# Altium PCB PCB V1.0.PcbDoc (part 3 of 3)
Units mil, origin at the board's own origin, x right, y up, seen from the top; angles counter-clockwise.
Board outline 1771.65 x 1771.65 mil, 6 copper layers (SIG/GND1, GND1, PWR, SIG/GND2, GND2, SIG/GND3), stack 60.866 mil thick; 267 components, 128 nets, 828 pads, 918 vias.
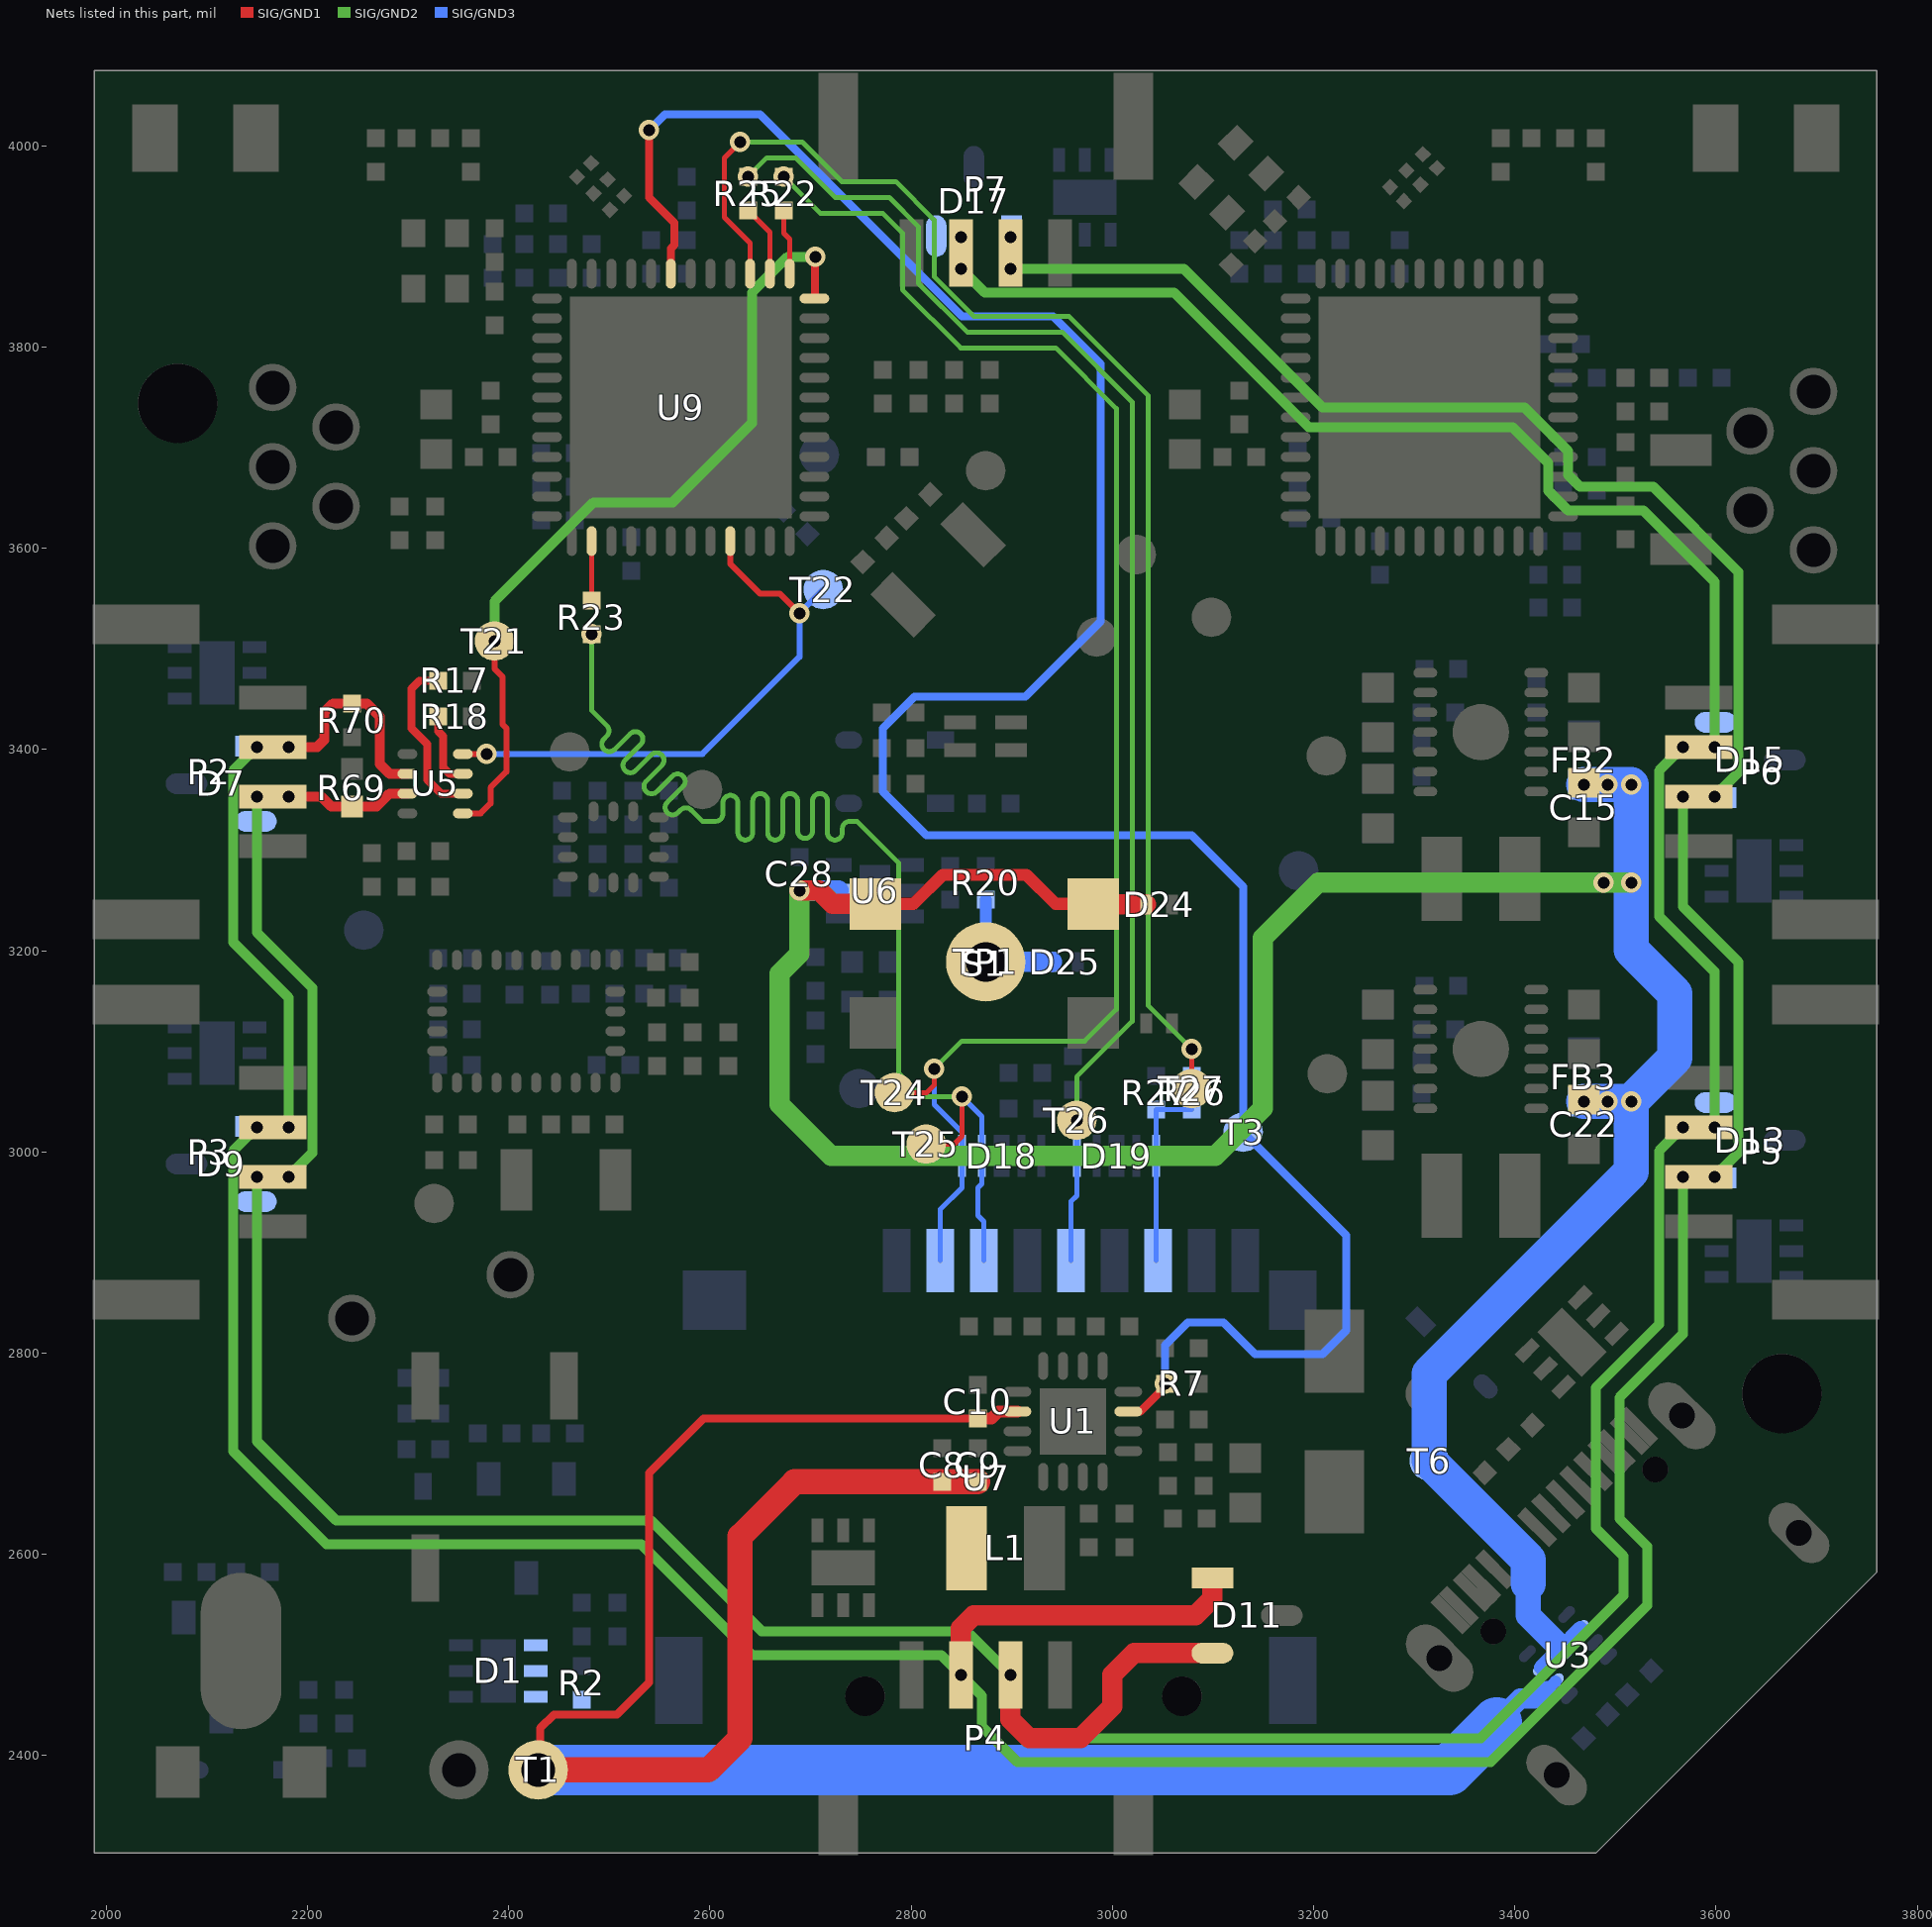
[diagram p7: the nets of this part, all layers, seen from the top]

## Via types
v1: diameter 20, hole 12, SIG/GND1 to SIG/GND3, tented both sides, 851 vias
v2: diameter 19.68, hole 11.81, SIG/GND1 to SIG/GND3, tented both sides, 67 vias

## Nets (pads, with @x,y where several pads share a name; then routed paths per layer and width w, separated by ;. In a path a pad name is that pad's centre, name@x,y a point inside that pad or via, vN(x,y) a via of type N, cw(c..) or ccw(c..) an arc to the next point about the centre after c; other vN are vias at no path point) (continued)
RS485_A: D7.1 D9.1 D11.1 D13.1 D15.1 D17.1 P2.2 P3.2 P4.2 P5.2 P6.2 P7.2 R70.1 U5.6 | length 5038.6
  SIG/GND1 w10: P2.2@2165.35,3402.56 v1(2181.1,3402.56) 2209.65,3402.56 2216.54,3409.45 2216.54,3437.01 2225.39,3445.87 R70.1@2244.09,3445.87 2258.86,3445.87 2271.65,3433.07 2271.65,3385.83 2281.5,3375.98 U5.6@2299.21,3375.98
  SIG/GND1 w20: v1(2849.41,2480.31) 2849.41,2526.57 2862.2,2539.37 3082.68,2539.37 3099.39,2556.08 D11.1@3099.39,2576.77
  SIG/GND2 w10: v1(2181.1,3402.56) v1(2149.61,3402.56) 2125.98,3378.94 2125.98,3208.66 2181.1,3153.54 v1(2181.1,3024.61) v1(2149.61,3024.61) 2125.98,3000.98 2125.98,2702.81 2218.56,2610.24 2531.5,2610.24 2641.73,2500 2829.72,2500 v1(2849.41,2480.31) 2870.08,2459.65 2870.08,2429.13 2905.51,2393.7 3375.93,2393.7 3531.5,2549.27 3531.5,2608.21 3503.94,2635.77 3503.94,2755.91 3566.93,2818.9 v1(3566.93,2975.39) v1(3598.43,2975.39) 3622.05,2999.02 3622.05,3188.98 3566.93,3244.09 v1(3566.93,3353.35) v1(3598.43,3353.35) 3622.05,3376.97 3622.05,3576.71 3537.34,3661.42 3464.57,3661.42 3452.76,3673.23 3452.76,3696.85 3409.45,3740.16 3208.66,3740.16 3070.87,3877.95 v1(2898.62,3877.95) v1(2898.62,3909.45)
RS485_B: D7.2 D9.2 D11.2 D13.2 D15.2 D17.2 P2.3 P3.3 P4.3 P5.3 P6.3 P7.3 R69.2 U5.7 | length 4811.6
  SIG/GND1 w10: v1(2181.1,3353.35) 2213.58,3353.35 2223.43,3343.5 R69.2@2244.09,3343.5 2268.7,3343.5 2281.5,3356.3 U5.7@2299.21,3356.3
  SIG/GND1 w20: v1(2898.62,2480.31) 2898.62,2436.02 2917.32,2417.32 2968.5,2417.32 3000,2448.82 3000,2480.32 3021.65,2501.97 D11.2@3099.39,2501.97
  SIG/GND2 w10: v1(2181.1,3353.35) v1(2149.61,3353.35) 2149.61,3218.45 2204.72,3163.33 2204.72,2999.02 v1(2181.1,2975.39) v1(2149.61,2975.39) 2149.61,2712.6 2228.35,2633.86 2541.28,2633.86 2651.52,2523.62 2855.32,2523.62 v1(2898.62,2480.31) 2898.62,2436.02 2917.32,2417.32 3366.14,2417.32 3507.87,2559.06 3507.87,2598.43 3480.32,2625.98 3480.32,2765.69 3543.31,2828.68 3543.31,3000.98 v1(3566.93,3024.61) v1(3598.43,3024.61) 3598.43,3179.19 3543.31,3234.31 3543.31,3378.94 v1(3566.93,3402.56) v1(3598.43,3402.56) 3598.43,3566.93 3527.56,3637.8 3452.76,3637.8 3433.07,3657.48 3433.07,3685.04 3397.64,3720.47 3194.94,3720.47 3061.08,3854.33 2873.03,3854.33 v1(2849.41,3877.95) v1(2849.41,3909.45)
RS485_R\E\: R17.1 U5.2 | length 168.1
  SIG/GND1 w8: R17.1@2329.72,3468.5 2311.02,3468.5 2303.15,3460.63 2303.15,3421.26 2318.9,3405.51 2318.9,3370.08 2332.68,3356.3 U5.2@2354.33,3356.3
RS485_RX: T21.0 U5.1 U9.12 | length 822.5
  SIG/GND1 w6: U5.1@2354.33,3336.61 2372.05,3336.61 2381.89,3346.46 2381.89,3362.2 2397.64,3377.95 2397.64,3421.26 2393.7,3425.2 2393.7,3472.44 2385.83,3480.32 v1(2385.83,3507.87)
  SIG/GND1 w8: U9.12@2703.74,3848.43 2704.23,3848.92 2704.23,3889.27 v1(2704.72,3889.76)
  SIG/GND2 w10: v1(2385.83,3507.87) 2385.83,3547.24 2484.25,3645.67 2562.99,3645.67 2641.73,3724.41 2641.73,3854.33 2677.17,3889.76 v1(2704.72,3889.76)
RS485_S\H\D\N\: R18.1 U5.3 | length 75.1
  SIG/GND1 w8: R18.1@2329.72,3433.07 2329.72,3418.31 2334.65,3413.39 2334.65,3382.36 2341.02,3375.98 U5.3@2354.33,3375.98
RS485_TX: T22.0 U5.4 U9.45 | length 563.2
  SIG/GND1 w6: U5.4@2354.33,3395.67 v1(2377.95,3395.67) ; U9.45@2620.08,3607.28 2620.08,3584.65 2649.61,3555.12 2669.29,3555.12 v1(2688.98,3535.43)
  SIG/GND3 w6: v1(2377.95,3395.67) 2592.52,3395.67 2688.98,3492.13 v1(2688.98,3535.43) T22.0@2712.6,3559.06
SD_MISO: R26.1 T27.0 U9.15 | length 1424.4
  SIG/GND1 w5.12: v1(2629.92,4003.94) 2614.17,3988.19 2614.17,3929.13 2639.76,3903.54 U9.15@2639.76,3873.03 ; T27.0@3078.74,3062.99 v1(3078.74,3102.36)
  SIG/GND2 w4.83: v1(2629.92,4003.94) 2691.56,4003.94 2730.93,3964.57 2784.7,3964.57 2822.83,3926.43 2822.83,3870.08 2862.2,3830.71 2956.69,3830.71 3035.43,3751.97 3035.43,3145.67 v1(3078.74,3102.36)
  SIG/GND3 w5.12: R26.1@3078.74,3075.79 3078.74,3098.43 v1(3078.74,3102.36)
SD_MISO_1: D19.1 D19.10 R26.2 R27.2 U7.7 | length 185.4
  SIG/GND3 w5.12: U7.7@3043.31,2892.32 D19.1@3043.31,2983.07 D19.10@3043.31,3009.06 R27.2@3043.31,3042.32 R26.2@3078.74,3042.32
SD_MOSI: R23.1 U9.38 | length 59.1
  SIG/GND1 w5.12: R23.1@2482.28,3548.23 U9.38@2482.28,3607.28
SD_MOSI_1: D18.4 D18.7 R23.2 T25.0 U7.3 | length 1490.4
  SIG/GND1 w5.12: T25.0@2814.96,3007.87 2842.52,3007.87 2850.39,3015.75 v1(2850.39,3055.12)
  SIG/GND2 w4.83: v1(2482.28,3514.76) 2482.28,3438.98 2487.2,3434.06 2488.91,3432.35 2497.39,3423.87 cw(c2492.15,3418.63) 2497.39,3413.38 2494.64,3410.64 ccw(c2499.89,3405.4) 2494.64,3400.15 ccw(c2499.89,3405.4) 2505.13,3400.15 2520.61,3415.63 cw(c2525.85,3410.39) 2531.1,3415.63 cw(c2525.85,3410.39) 2531.1,3405.14 2515.62,3389.66 ccw(c2520.86,3384.42) 2515.62,3379.18 ccw(c2520.86,3384.42) 2526.11,3379.18 2541.58,3394.65 cw(c2546.83,3389.41) 2552.07,3394.65 cw(c2546.83,3389.41) 2552.07,3384.17 2536.59,3368.69 ccw(c2541.84,3363.45) 2536.59,3358.2 ccw(c2541.84,3363.45) 2547.08,3358.2 2562.56,3373.68 cw(c2567.8,3368.44) 2573.04,3373.68 cw(c2567.8,3368.44) 2573.04,3363.19 2557.57,3347.72 ccw(c2562.81,3342.47) 2557.57,3337.23 ccw(c2562.81,3342.47) 2568.06,3337.23 2570.8,3339.97 cw(c2576.04,3334.73) 2581.29,3339.97 2583,3338.26 2592.52,3328.74 2595.47,3328.74 2605.46,3328.74 ccw(c2605.46,3336.16) 2612.87,3336.16 2612.87,3347.13 cw(c2620.29,3347.13) 2627.7,3347.13 2627.7,3317.51 ccw(c2635.12,3317.51) 2642.53,3317.51 2642.53,3348.84 cw(c2649.95,3348.84) 2657.37,3348.84 2657.37,3317.51 ccw(c2664.78,3317.51) 2672.2,3317.51 2672.2,3348.84 cw(c2679.61,3348.84) 2687.03,3348.84 2687.03,3319.14 ccw(c2694.44,3319.14) 2701.86,3319.14 2701.86,3348.84 cw(c2709.27,3348.84) 2716.69,3348.84 2716.69,3317.51 ccw(c2724.11,3317.51) 2731.52,3317.51 2731.52,3321.32 cw(c2738.94,3321.32) 2738.94,3328.74 2741.35,3328.74 2746.06,3328.74 2787.4,3287.4 2787.4,3078.74 2811.02,3055.12 v1(2850.39,3055.12)
  SIG/GND3 w5.12: v1(2850.39,3055.12) 2870.08,3035.43 D18.7@2870.08,3009.06 D18.4@2870.08,2983.07 2870.08,2968.5 2866.14,2964.57 2866.14,2937.01 2872.24,2930.91 U7.3@2872.24,2892.32
SD_NSS: R22.1 U9.13 | length 65.4
  SIG/GND1 w5.12: R22.1@2673.23,3936.02 2673.23,3913.39 2679.13,3907.48 U9.13@2679.13,3873.03
SD_NSS_1: D18.5 D18.6 R22.2 T24.0 U7.2 | length 1531.2
  SIG/GND1 w5.12: T24.0@2783.46,3059.06 2815.25,3059.06 2822.83,3066.64 v1(2822.83,3082.68)
  SIG/GND2 w4.83: v1(2673.23,3969.49) 2709.65,3933.07 2771.65,3933.07 2791.34,3913.39 2791.34,3857.03 2849.16,3799.21 2943.65,3799.21 3003.94,3738.92 3003.94,3141.73 2972.44,3110.24 2850.39,3110.24 v1(2822.83,3082.68)
  SIG/GND3 w5.12: v1(2822.83,3082.68) 2822.83,3047.24 2850.39,3019.69 D18.6@2850.39,3009.06 D18.5@2850.39,2983.07 2850.39,2964.57 2828.94,2943.11 U7.2@2828.94,2892.32
SD_SCK: R25.1 U9.14 | length 72
  SIG/GND1 w5.12: R25.1@2637.8,3936.02 2659.45,3914.37 U9.14@2659.45,3873.03
SD_SCK_1: D19.5 D19.6 R25.2 T26.0 U7.5 | length 1401.5
  SIG/GND2 w4.83: v1(2637.8,3969.49) 2656.5,3988.19 2685.04,3988.19 2724.41,3948.82 2778.18,3948.82 2807.09,3919.91 2807.09,3863.56 2855.68,3814.96 2950.17,3814.96 3019.68,3745.45 3019.68,3129.92 2964.57,3074.8 v1(2964.57,3031.5)
  SIG/GND3 w5.12: U7.5@2958.86,2892.32 2958.86,2950.99 2964.57,2956.69 D19.5@2964.57,2983.07 D19.6@2964.57,3009.06 v1(2964.57,3031.5)
STAT: R7.1 T3.0 U1.3 U9.19 | length 2473.1
  SIG/GND1 w8: v1(2539.37,4015.75) 2539.37,3948.82 2564.45,3923.74 2564.45,3901.32 2561.02,3897.9 U9.19@2561.02,3873.03 ; U1.3@3015.75,2742.13 3027.56,2742.13 3052.17,2766.73 v1(3052.17,2769.69)
  SIG/GND3 w8: v1(2539.37,4015.75) 2555.12,4031.5 2649.61,4031.5 2850.39,3830.71 2940.94,3830.71 2988.19,3783.46 2988.19,3527.56 2913.39,3452.76 2803.15,3452.76 2771.65,3421.26 2771.65,3358.27 2814.96,3314.96 3078.74,3314.96 3129.92,3263.78 T3.0@3129.92,3019.68 3232.28,2917.32 3232.28,2822.83 3208.66,2799.21 3141.73,2799.21 3110.24,2830.71 3074.8,2830.71 3052.17,2808.07 v1(3052.17,2769.69)
Touch_input: D25.1 R20.2 TP1.0 | length 128
  SIG/GND3 w12: TP1.0@2874.02,3188.98 R20.2@2874.02,3250.98
  SIG/GND3 w20: TP1.0@2874.02,3188.98 D25.1@2939.96,3188.98
VBAT: C8.1 C9.1 C10.2 D1.4 D1.5 D1.6 L1.2 R2.2 T1.0 U1.10 U3.6 | length 2489.8
  SIG/GND1 w8: T1.0@2429.13,2385.83 2431.29,2387.98 2431.29,2427.35 2444.88,2440.94 2507.62,2440.94 2539.37,2472.69 2539.37,2681.1 2593.5,2735.24 C10.2@2866.14,2735.24
  SIG/GND1 w12: C10.2@2866.14,2735.24 2879.72,2735.24 2886.61,2742.13 U1.10@2905.51,2742.13
  SIG/GND1 w25: T1.0@2429.13,2385.83 2598.43,2385.83 2629.92,2417.32 2629.92,2618.11 2684.06,2672.24 C8.1@2830.71,2672.24 C9.1@2866.14,2672.24
  SIG/GND3 w12: 3430.75,2464.07 U3.6@3440.23,2473.55
  SIG/GND3 w20: 3381.89,2433.07 3405.51,2456.69 3423.37,2456.69 3430.75,2464.07
  SIG/GND3 w50: T1.0@2429.13,2385.83 3334.65,2385.83 3381.89,2433.07
VBAT/5V: C15.1 C22.1 C28.1 D24.1 FB2.1 FB3.1 S1.1 S1.2 T6.0 U3.2 U3.7 U6.5 | length 2894.3
  SIG/GND1 w12: S1.1@2764.61,3246.61 2802.29,3246.61 2831.27,3275.59 2914.49,3275.59 2943.46,3246.61 S1.2@2981.15,3246.61
  SIG/GND1 w20: v1(2688.98,3259.84) 2708.66,3259.84 2721.89,3246.61 S1.1@2764.61,3246.61 ; S1.2@2981.15,3246.61 2981.7,3246.06 D24.1@3033.46,3246.06
  SIG/GND2 w20: v1(2688.98,3259.84) 2688.98,3196.85 2669.29,3177.17 2669.29,3047.24 2720.47,2996.06 3102.36,2996.06 3149.61,3043.31 3149.61,3212.6 3204.72,3267.72 v1(3515.75,3267.72)
  SIG/GND3 w15: U3.7@3426.31,2487.47 3445.8,2506.96 U3.2@3465.28,2526.45
  SIG/GND3 w20: v1(2688.98,3259.84) U6.5@2727.95,3259.84
  SIG/GND3 w25: 3413.39,2570.87 3413.39,2539.37 3445.8,2506.96
  SIG/GND3 w35: 3413.39,2570.87 3413.39,2594.49 T6.0@3314.96,2692.91 3314.96,2779.53 3515.75,2980.31 v1(3515.75,3050.2) ; v1(3468.5,3050.2) v1(3492.13,3050.2) v1(3515.75,3050.2) ; v1(3468.5,3365.16) v1(3492.13,3365.16) v1(3515.75,3365.16) 3515.75,3200.79 3559.06,3157.48 3559.06,3093.5 v1(3515.75,3050.2)
  other v1: 3488.19,3267.72
pads on no net: ANT1.2 ANT2.2 D18.2 D18.9 D19.2 D19.4 D19.7 D19.9 J1. J1.A6 J1.A7 J1.A8 J1.B6 J1.B7 J1.B8 LS1.3 U1.5 U1.8 U2.14 U4.14 U7. U7.1 U7.8 U7.9 U8.3 U9.26 U9.27 U11.5 U11.6 U11.9 U11.10 U11.11 U11.12 U11.13 U11.14 U11.15 U11.16 U11.17 U11.18 U11.19 U11.26 U11.27 U11.28 U11.29 U11.30 U11.36 U11.37 U11.38 U11.42 U11.44 U13.1 U13.7 U13.8 U13.12 U13.13 U13.18 U13.21 U13.22 U13.23 U13.24 U14.2 U14.3 U14.7 U14.10 U14.11

## Polygon pours and split planes (outlines as drawn)
GND on SIG/GND3 "NONET_L-01_P-001" (solid, pour order 4): 1988.19,2303.15 1988.19,3818.9 2244.09,3818.9 2244.09,4074.8 3503.94,4074.8 3503.94,3818.9 3759.84,3818.9 3759.84,2582.68 3480.31,2303.15 1988.19,2303.15
5V_main on PWR "NONET_L-01_P-001" (solid, pour order 0): 2090.55,3535.43 2118.11,3562.99 2208.66,3562.99 2244.09,3527.56 2244.09,3275.59 2275.59,3244.09 2275.59,2905.51 2236.22,2866.14 2236.22,2704.72 2303.15,2637.8 3082.68,2637.8 3149.61,2704.72 3149.61,3078.74 3188.98,3118.11 3275.59,3118.11 3314.96,3078.74 3314.96,3007.87 3358.27,2964.57 3430.12,2964.57 3460.63,2995.08 3460.63,3523.62 3425.2,3559.06 3330.71,3559.06 3208.66,3681.1 3066.93,3681.1 2921.26,3826.77 2921.26,3921.26 2937.01,3937.01 3035.43,3937.01 3165.35,3807.09 3381.89,3807.09 3472.44,3716.54 3515.75,3716.54 3666.25,3566.03 3664.46,2739.26 3318.9,2393.7 2295.28,2393.7 2090.55,2598.43
3V3_main on PWR "PWR-3V3_main" (solid, pour order 3): 2236.22,2704.72 2303.15,2637.8 3082.68,2637.8 3149.61,2704.72 3149.61,3078.74 3188.98,3118.11 3275.59,3118.11 3460.63,3303.15 3460.63,3523.62 3425.2,3559.06 3330.71,3559.06 3208.66,3681.1 3066.93,3681.1 2921.26,3826.77 2921.26,3937.01 3035.43,3937.01 3165.35,3807.09 3188.98,3807.09 3228.35,3846.46 3228.35,4027.56 3212.6,4043.31 2787.4,4043.31 2767.72,4023.62 2437.01,4023.62 2338.58,3925.2 2338.58,3850.39 2244.09,3755.91 2244.09,3275.59 2275.59,3244.09 2275.59,2905.51 2236.22,2866.14
GND on PWR "NONET_L-01_P-001" (solid, pour order 5): 1988.19,2303.15 1988.19,3818.9 2244.09,3818.9 2244.09,4074.8 3503.94,4074.8 3503.94,3818.9 3759.84,3818.9 3759.84,2582.68 3480.31,2303.15 1988.19,2303.15
GND on SIG/GND2 "NONET_L-01_P-001" (solid, pour order 6): 1988.19,2303.15 1988.19,3818.9 2244.09,3818.9 2244.09,4074.8 3503.94,4074.8 3503.94,3818.9 3759.84,3818.9 3759.84,2582.68 3480.31,2303.15 1988.19,2303.15
GND on SIG/GND1 "NONET_L-01_P-001" (solid, pour order 7): 1988.19,2303.15 1988.19,3818.9 2244.1,3818.9 2244.1,4074.8 3503.94,4074.8 3503.94,3818.9 3759.84,3818.9 3759.84,2582.68 3480.32,2303.15 1988.19,2303.15
GND on GND2 (split plane): 3503.94,3818.9 3754.74,3818.9 3754.74,2584.79 3478.2,2308.25 1993.29,2308.25 1993.29,3818.9 2244.09,3818.9 2244.09,4069.71 3503.94,4069.71
GND on GND1 (split plane): 3503.94,3818.9 3754.74,3818.9 3754.74,2584.79 3478.2,2308.25 1993.29,2308.25 1993.29,3818.9 2244.09,3818.9 2244.09,4069.71 3503.94,4069.71

## Keep-outs
SIG/GND1:
  region: 1988.19,4074.8 1988.19,3818.9 2244.09,3818.9 2244.09,4074.8
  region: 3503.94,4074.8 3503.94,3818.9 3759.84,3818.9 3759.84,4074.8
PWR:
  region: 3503.94,4074.8 3503.94,3818.9 3759.84,3818.9 3759.84,4074.8
  region: 1988.19,4074.8 1988.19,3818.9 2244.09,3818.9 2244.09,4074.8
  lines w5: 2090.55,2598.43 2295.28,2393.7 3318.9,2393.7 3665.35,2740.16 3665.35,3566.93 3515.75,3716.54 3472.44,3716.54 3381.89,3807.09 3165.35,3807.09 3035.43,3937.01 2937.01,3937.01 2921.26,3921.26 2921.26,3826.77 3066.93,3681.1 3208.66,3681.1 3330.71,3559.06 3425.2,3559.06 3460.63,3523.62 3460.63,2995.08 3430.12,2964.57 3358.27,2964.57 3314.96,3007.87 3314.96,3078.74 3275.59,3118.11 3188.98,3118.11 3149.61,3078.74 3149.61,2704.72 3082.68,2637.8 2303.15,2637.8 2236.22,2704.72 2236.22,2866.14 2275.59,2905.51 2275.59,3244.09 2244.09,3275.59 2244.09,3527.56 2208.66,3562.99 2118.11,3562.99 2090.55,3535.43 2090.55,2598.43
SIG/GND2:
  region: 3503.94,4074.8 3503.94,3818.9 3759.84,3818.9 3759.84,4074.8
  region: 1988.19,4074.8 1988.19,3818.9 2244.09,3818.9 2244.09,4074.8
SIG/GND3:
  region: 3503.94,4074.8 3503.94,3818.9 3759.84,3818.9 3759.84,4074.8
  region: 1988.19,4074.8 1988.19,3818.9 2244.09,3818.9 2244.09,4074.8
Keep-Out Layer:
  the board outline again, w8.27

## Other copper
SIG/GND1:
  region net NetC3_1: 3080.71,2643.7 cw(c3085.63,2643.7) 3085.63,2648.62 3104.33,2648.62 ccw(c3104.33,2656.5) 3112.2,2656.5 cw(c3122.05,2656.5) 3122.05,2666.34 3143.15,2666.34 ccw(c3143.15,2703.3) 3169.29,2677.17 3187.47,2695.34 ccw(c3179.06,2703.74) 3190.94,2703.74 3245.08,2703.74 3245.08,2621.06 3089.57,2621.06 cw(c3089.57,2629.92) 3080.71,2629.92
  region net 3V3_MCU2: 2417.32,3677.17 ccw(c2417.32,3645.67) 2385.83,3645.67 2385.83,3641.73 ccw(c2397.64,3641.73) 2397.64,3629.92 ccw(c2397.64,3639.43) 2404.36,3632.71 2411.76,3640.1 cw(c2425.2,3626.66) 2425.2,3645.67 2448.82,3645.67 ccw(c2448.82,3651.57) 2454.72,3651.57 2454.72,3672.24 ccw(c2449.8,3672.24) 2449.8,3677.17
  region net 3V3_MCU1: 3168.62,3678.15 ccw(c3168.62,3651.27) 3149.61,3670.28 ccw(c3173.37,3646.51) 3139.76,3646.51 3139.76,3641.73 ccw(c3149.61,3641.73) 3149.61,3631.89 ccw(c3149.61,3643.77) 3158.01,3635.37 3161.42,3638.78 cw(c3175.67,3624.52) 3175.67,3644.68 3191.93,3644.68 ccw(c3191.93,3651.57) 3198.82,3651.57 3198.82,3671.26 ccw(c3191.93,3671.26) 3191.93,3678.15
  region net 3V3_MCU1: 3413.39,3573.82 3413.39,3576.53 cw(c3423.47,3576.53) 3416.34,3583.66 ccw(c3411.59,3588.41) 3418.31,3588.41 3418.31,3617.13 cw(c3423.23,3617.13) 3423.23,3622.05 ccw(c3423.23,3631.89) 3433.07,3631.89 cw(c3437.99,3631.89) 3437.99,3636.81 3457.68,3636.81 cw(c3457.68,3631.89) 3462.6,3631.89 3462.6,3590.38 ccw(c3469.32,3590.38) 3464.57,3585.63 cw(c3459.81,3580.88) 3466.54,3580.88 3466.54,3573.82 cw(c3456.69,3573.82) 3456.69,3563.98 3423.23,3563.98 cw(c3423.23,3573.82)
  region net 3V3_ERM: 2169.29,2401.57 cw(c2181.1,2401.57) 2181.1,2413.39 2200.79,2413.39 ccw(c2200.79,2433.07) 2220.47,2433.07 cw(c2232.28,2433.07) 2232.28,2444.88 2236.22,2444.88 cw(c2236.22,2433.07) 2248.03,2433.07 cw(c2229.02,2433.07) 2242.46,2419.63 2236.7,2413.86 ccw(c2256.86,2393.7) 2228.35,2393.7 2228.35,2366.14 cw(c2216.54,2366.14) 2216.54,2354.33 2177.17,2354.33 cw(c2177.17,2362.2) 2169.29,2362.2
  region net 3V3_main: 3316.93,3390.75 ccw(c3316.93,3397.64) 3323.82,3397.64 3323.82,3417.32 ccw(c3317.91,3417.32) 3317.91,3423.23 3305.53,3423.23 ccw(c3305.53,3419.87) 3303.15,3422.24 cw(c3298.4,3427) 3298.4,3420.28 3293.31,3420.28 cw(c3293.31,3436.91) 3281.55,3425.15 3279.53,3427.17 ccw(c3272.4,3420.04) 3272.4,3430.12 3220.47,3430.12 ccw(c3220.47,3414.37) 3219.89,3430.11 ccw(c3218.91,3383.57) 3218.91,3430.12 ccw(c3218.91,3396.25) 3185.04,3396.25 3185.04,3379.92 ccw(c3217.52,3379.92) 3217.52,3347.44 3273.62,3347.44 ccw(c3273.62,3360.24) 3286.42,3360.24 3286.42,3377.95 cw(c3299.21,3377.95) 3299.21,3390.75 3291.48,3390.75
  region net 5V_main: 3316.93,3075.79 ccw(c3316.93,3082.68) 3323.82,3082.68 3323.82,3102.36 ccw(c3317.91,3102.36) 3317.91,3108.27 3305.53,3108.27 ccw(c3305.53,3104.91) 3303.15,3107.28 cw(c3298.4,3112.04) 3298.4,3105.32 3293.31,3105.32 cw(c3293.31,3121.95) 3281.55,3110.19 3279.53,3112.2 ccw(c3272.4,3105.08) 3272.4,3115.16 3220.47,3115.16 ccw(c3220.47,3099.41) 3219.89,3115.15 ccw(c3218.91,3068.6) 3218.91,3115.16 ccw(c3218.91,3081.29) 3185.04,3081.29 3185.04,3064.96 ccw(c3217.52,3064.96) 3217.52,3032.48 3273.62,3032.48 ccw(c3273.62,3045.28) 3286.42,3045.28 3286.42,3062.99 cw(c3299.21,3062.99) 3299.21,3075.79 3291.48,3075.79
  region net NetL3_2: 3414.37,3069.88 ccw(c3414.37,3062.99) 3407.48,3062.99 3407.48,3020.67 cw(c3384.84,3020.67) 3384.84,2998.03 3384.84,2915.35 3424.21,2915.35 ccw(c3390.95,2948.62) 3437.99,2948.62 3437.99,3062.99 ccw(c3431.1,3062.99) 3431.1,3069.88
  region net NetL3_1: 3317.91,3069.88 cw(c3317.91,3062.99) 3324.8,3062.99 3324.8,3020.67 ccw(c3347.44,3020.67) 3347.44,2998.03 3347.44,2915.35 3308.07,2915.35 cw(c3341.34,2948.62) 3294.29,2948.62 3294.29,3062.99 cw(c3301.18,3062.99) 3301.18,3069.88
  region net NetL2_1: 3317.91,3384.84 cw(c3317.91,3377.95) 3324.8,3377.95 3324.8,3335.63 ccw(c3347.44,3335.63) 3347.44,3312.99 3347.44,3230.32 3308.07,3230.32 cw(c3341.34,3263.58) 3294.29,3263.58 3294.29,3377.95 cw(c3301.18,3377.95) 3301.18,3384.84
  region net NetL2_2: 3414.37,3384.84 ccw(c3414.37,3377.95) 3407.48,3377.95 3407.48,3335.63 cw(c3384.84,3335.63) 3384.84,3312.99 3384.84,3230.32 3424.21,3230.32 ccw(c3390.95,3263.58) 3437.99,3263.58 3437.99,3377.95 ccw(c3431.1,3377.95) 3431.1,3384.84
  region net NetC16_1: 3503.94,3390.75 ccw(c3503.94,3414.37) 3527.56,3414.37 ccw(c3511.81,3414.37) 3511.81,3430.12 3459.88,3430.12 ccw(c3459.88,3420.04) 3452.76,3427.17 3450.74,3425.15 cw(c3438.98,3436.91) 3438.98,3420.28 3433.89,3420.28 cw(c3433.89,3427) 3429.13,3422.24 ccw(c3426.76,3419.87) 3426.76,3423.23 3414.37,3423.23 ccw(c3414.37,3417.32) 3408.46,3417.32 3408.46,3397.64 ccw(c3415.35,3397.64) 3415.35,3390.75
  region net NetC23_1: 3503.94,3075.79 ccw(c3503.94,3099.41) 3527.56,3099.41 ccw(c3511.81,3099.41) 3511.81,3115.16 3459.88,3115.16 ccw(c3459.88,3105.08) 3452.76,3112.2 3450.74,3110.19 cw(c3438.98,3121.95) 3438.98,3105.32 3433.89,3105.32 cw(c3433.89,3112.04) 3429.13,3107.28 ccw(c3426.76,3104.91) 3426.76,3108.27 3414.37,3108.27 ccw(c3414.37,3102.36) 3408.46,3102.36 3408.46,3082.68 ccw(c3415.35,3082.68) 3415.35,3075.79
  region net VBAT/5V: 3515.75,3035.43 ccw(c3515.75,3051.18) 3531.5,3051.18 3531.5,3055.12 ccw(c3515.75,3055.12) 3515.75,3070.87 3456.69,3070.87 ccw(c3456.69,3062.99) 3448.82,3062.99 3448.82,3043.31 ccw(c3456.69,3043.31) 3456.69,3035.43
  region net VBAT/5V: 3515.75,3350.39 ccw(c3515.75,3366.14) 3531.5,3366.14 3531.5,3370.08 ccw(c3515.75,3370.08) 3515.75,3385.83 3456.69,3385.83 ccw(c3456.69,3377.95) 3448.82,3377.95 3448.82,3358.27 ccw(c3456.69,3358.27) 3456.69,3350.39
  region net 3V3_BZ: 2299.21,2736.22 ccw(c2307.09,2736.22) 2307.09,2728.35 cw(c2307.09,2716.54) 2318.9,2716.54 2318.9,2704.72 cw(c2290.38,2704.72) 2310.55,2684.56 2304.78,2678.8 ccw(c2318.22,2665.35) 2299.21,2665.35 ccw(c2311.02,2665.35) 2311.02,2653.54 2322.83,2653.54 ccw(c2322.83,2681.1) 2350.39,2681.1 2350.39,2783.46 ccw(c2330.71,2783.46) 2330.71,2803.15 2303.15,2803.15 ccw(c2303.15,2799.21) 2299.21,2799.21
  region net 5V_main: 3614.17,2940.94 cw(c3614.17,2937.01) 3618.11,2937.01 3618.11,2877.95 cw(c3602.36,2877.95) 3602.36,2862.2 cw(c3602.36,2917.32) 3547.24,2917.32 3547.24,2937.01 cw(c3551.18,2937.01) 3551.18,2940.94
  region net 5V_main: 2933.07,3925.2 cw(c2937.01,3925.2) 2937.01,3929.13 2996.06,3929.13 cw(c2996.06,3913.39) 3011.81,3913.39 cw(c2956.69,3913.39) 2956.69,3858.27 2937.01,3858.27 cw(c2937.01,3862.2) 2933.07,3862.2
  region net 5V_main: 2133.86,3437.01 cw(c2133.86,3440.94) 2129.92,3440.95 2129.92,3500 cw(c2145.67,3500) 2145.67,3515.75 cw(c2145.67,3460.63) 2200.79,3460.63 2200.79,3440.95 cw(c2196.85,3440.94) 2196.85,3437.01
  region net 5V_main: 2133.86,3059.06 cw(c2133.86,3062.99) 2129.92,3062.99 2129.92,3122.05 cw(c2145.67,3122.05) 2145.67,3137.8 cw(c2145.67,3082.68) 2200.79,3082.68 2200.79,3062.99 cw(c2196.85,3062.99) 2196.85,3059.06
  region net 5V_main: 3614.17,3318.9 cw(c3614.17,3314.96) 3618.11,3314.96 3618.11,3255.91 cw(c3602.36,3255.91) 3602.36,3240.16 cw(c3602.36,3295.28) 3547.24,3295.28 3547.24,3314.96 cw(c3551.18,3314.96) 3551.18,3318.9
  region net 5V_main: 2787.4,2448.82 2787.4,2476.38 ccw(c2748.03,2476.38) 2748.03,2515.75 2720.47,2515.75 cw(c2720.47,2543.31) 2692.91,2543.31 2692.91,2555.12 cw(c2700.79,2555.12) 2700.79,2562.99 2763.78,2562.99 cw(c2763.78,2507.87) 2818.9,2507.87 2818.9,2448.82 cw(c2811.02,2448.82) 2811.02,2440.94 2795.28,2440.94 cw(c2795.28,2448.82)
  region net VBAT: 2791.34,2684.06 cw(c2798.47,2676.93) 2798.47,2687.01 2866.14,2687.01 cw(c2866.14,2670.28) 2882.87,2670.28 2882.87,2573.82 cw(c2871.06,2573.82) 2871.06,2562.01 2836.61,2562.01 cw(c2836.61,2569.88) 2828.74,2569.88 2828.74,2623.03 ccw(c2791.34,2623.03) 2791.34,2660.43
  region net NetC2_2: 2957.68,2633.86 ccw(c2972.44,2633.86) 2972.44,2619.09 2982.28,2619.09 cw(c2982.28,2614.17) 2987.2,2614.17 2987.2,2599.41 cw(c2981.3,2599.41) 2981.3,2593.5 2974.41,2593.5 ccw(c2974.41,2571.85) 2952.76,2571.85 2952.76,2564.96 2912.4,2564.96 cw(c2931.41,2583.97) 2904.53,2583.97 2904.53,2666.34 cw(c2931.1,2666.34) 2931.1,2692.91 2950.79,2692.91 cw(c2950.79,2686.02) 2957.68,2686.02
  region net NetC4_1: 3000,2702.76 cw(c3006.89,2702.76) 3006.89,2709.65 3030.27,2709.65 ccw(c3030.27,2719.73) 3037.4,2712.6 cw(c3046.91,2703.09) 3046.91,2716.54 3144.69,2716.54 cw(c3144.69,2707.68) 3153.54,2707.68 3153.54,2684.06 cw(c3147.64,2684.06) 3147.64,2678.15 3114.41,2678.15 cw(c3114.41,2688.23) 3107.28,2681.1 ccw(c3093.03,2666.85) 3093.03,2687.01 3015.75,2687.01 cw(c3015.75,2702.76)
  region net 5V_in: 3459.65,2719.49 3434.41,2744.72 ccw(c3419.29,2729.6) 3419.29,2750.98 3413.29,2750.98 ccw(c3413.29,2727.46) 3396.65,2744.09 3379.92,2760.83 3379.92,2782.75 cw(c3410.17,2782.75) 3388.78,2804.13 3396.99,2812.35 cw(c3410.43,2798.9) 3410.43,2817.91 3410.77,2817.91 cw(c3410.77,2804.47) 3420.28,2813.98 3476.14,2758.11 cw(c3466.06,2748.03) 3480.32,2748.03 3480.32,2741.62 ccw(c3500.48,2741.62) 3486.22,2727.36 3470.18,2711.33 cw(c3468.5,2713.01) 3468.5,2710.63
  region net 3V3_MCU2: 2688.98,3631.89 cw(c2679.13,3631.89) 2679.13,3622.05 ccw(c2679.13,3617.13) 2674.21,3617.13 2674.21,3597.44 ccw(c2679.13,3597.44) 2679.13,3592.52 ccw(c2679.13,3631.89) 2718.5,3631.89 ccw(c2713.58,3631.89) 2713.58,3636.81 2693.9,3636.81 ccw(c2693.9,3631.89)
PWR:
  region net 3V3_MCU2: 2421.26,3712.6 cw(c2392.75,3712.6) 2412.91,3692.44 2393.03,3672.55 ccw(c2419.91,3645.67) 2381.89,3645.67 2381.89,3641.73 ccw(c2397.64,3641.73) 2397.64,3625.98 2408.49,3625.98 ccw(c2408.49,3666.31) 2437.01,3637.8 cw(c2465.52,3609.28) 2465.52,3649.61 2480.32,3649.61 2480.32,3673.23 cw(c2480.32,3712.6) 2440.94,3712.6
SIG/GND2:
  region net 3V3_MCU1: 3248.03,3625.98 cw(c3248.03,3654.5) 3227.87,3634.34 3189.45,3672.75 ccw(c3169.29,3652.59) 3169.29,3681.1 3155.17,3681.1 ccw(c3155.17,3667.66) 3145.67,3677.17 3139.43,3670.92 ccw(c3152.87,3657.48) 3133.86,3657.48 3133.86,3648.93 ccw(c3160.74,3648.93) 3141.73,3629.92 3153.74,3617.91 ccw(c3200.79,3664.96) 3200.79,3598.43 3238.53,3598.43 ccw(c3238.53,3611.87) 3248.03,3602.36
  region net 3V3_main: 3204.72,3925.2 ccw(c3176.21,3953.71) 3216.54,3953.71 3216.54,4015.75 ccw(c3200.79,4015.75) 3200.79,4031.5 3161.42,4031.5 ccw(c3161.42,4011.81) 3141.73,4011.81 3141.73,3997.02 ccw(c3182.06,3997.02) 3153.54,3968.5 3169.97,3952.08 cw(c3143.08,3925.2) 3181.1,3925.2
  region net VBAT/5V: 3460.63,3275.59 cw(c3479.64,3256.58) 3479.64,3283.46 3515.75,3283.46 cw(c3515.75,3267.72) 3531.5,3267.72 cw(c3515.75,3267.72) 3515.75,3251.97 3479.64,3251.97 cw(c3479.64,3278.85) 3460.63,3259.84
  region net 3V3_MCU1: 3380.91,3615.16 3381.8,3614.26 ccw(c3427.17,3659.63) 3427.17,3595.47 3449.8,3595.47 cw(c3449.8,3573.82) 3471.46,3573.82 cw(c3456.69,3573.82) 3456.69,3559.06 3407.14,3559.06 cw(c3407.14,3572.5) 3397.64,3562.99 3371.71,3588.92 cw(c3385.15,3602.36) 3366.14,3602.36
SIG/GND3:
  region net VBAT/5V: 3430.12,2585.63 3430.12,2552.88 ccw(c3460.36,2552.88) 3438.98,2531.5 3443.08,2527.39 ccw(c3449.8,2534.11) 3449.8,2524.61 3450.55,2524.61 ccw(c3450.55,2534.69) 3457.68,2527.56 3466.54,2518.7 3462.48,2514.65 ccw(c3471.29,2505.84) 3458.83,2505.84 3458.83,2504.83 cw(c3448.7,2504.83) 3455.86,2497.67 3454.97,2496.77 cw(c3445.9,2505.84) 3445.9,2493.02 ccw(c3445.9,2482.05) 3438.15,2489.8 3431.4,2483.05 3422.24,2492.21 3422.24,2492.28 3423.44,2493.48 ccw(c3414.75,2502.17) 3427.04,2502.17 3427.04,2503.31 ccw(c3414.66,2503.31) 3423.41,2512.06 3419.72,2515.75 cw(c3477.94,2573.98) 3395.61,2573.98 3395.61,2583.5 cw(c3403.66,2583.5) 3397.96,2589.2
  region net 3V3_main: 3119.09,3895.67 3166.34,3895.67 ccw(c3166.34,3899.61) 3170.28,3899.61 3170.28,3927.29 cw(c3234.12,3927.29) 3188.98,3972.44 3201.46,3984.93 ccw(c3174.58,4011.81) 3212.6,4011.81 ccw(c3196.85,4011.81) 3196.85,4027.56 3164.68,4027.56 ccw(c3164.68,4000.68) 3145.67,4019.68 3144.45,4018.46 ccw(c3215.16,3947.75) 3115.16,3947.75 3115.16,3899.61 ccw(c3119.09,3899.61)
  region net VBAT/5V: 3445.87,3358.27 ccw(c3459.65,3358.27) 3459.65,3344.49 3464.57,3344.49 cw(c3464.57,3310.04) 3498.36,3316.72 3498.19,3316.73 cw(c3470.55,3316.73) 3490.09,3297.18 3480.32,3287.4 ccw(c3499.32,3268.39) 3472.44,3268.39 3472.44,3256.86 ccw(c3512.77,3256.86) 3484.25,3228.35 3488.86,3223.73 cw(c3461.98,3196.85) 3500,3196.85 3543.31,3196.85 cw(c3552.81,3206.36) 3539.37,3206.36 3539.37,3308.14 ccw(c3529.29,3308.14) 3536.42,3315.27 3536.35,3315.27 ccw(c3522.98,3316.59) 3536.42,3316.59 3536.42,3368.11 ccw(c3517.72,3368.11) 3517.72,3386.81 3458.66,3386.81 ccw(c3458.66,3374.02) 3445.87,3374.02
  region net 3V3_MCU2: 2410.43,3617.13 cw(c2410.43,3639.76) 2387.8,3639.76 2387.8,3644.71 cw(c2428.12,3644.71) 2399.61,3673.23 2413.03,3686.65 ccw(c2397.91,3701.77) 2419.29,3701.77 cw(c2423.23,3701.77) 2423.23,3705.71 2439.96,3705.71 cw(c2439.96,3701.77) 2443.9,3701.77 2443.9,3625 cw(c2436.02,3625) 2436.02,3617.13
  region net 3V3_MCU1: 3184.06,3707.68 ccw(c3184.05,3662.4) 3138.78,3662.4 3138.78,3640.75 ccw(c3161.42,3640.75) 3161.42,3618.11 3191.93,3618.11 ccw(c3191.93,3625) 3198.82,3625 3198.82,3697.83 ccw(c3188.98,3697.83) 3188.98,3707.68
  region net NetC59_1: 3233.27,3895.67 ccw(c3233.27,3899.61) 3237.2,3899.61 3237.2,3910.43 ccw(c3199.8,3910.43) 3199.8,3947.83 3186.02,3947.83 ccw(c3186.02,3943.9) 3182.09,3943.9 3182.09,3899.61 ccw(c3186.02,3899.61) 3186.02,3895.67
  region net 3V3_ICM: 2421.26,3326.84 ccw(c2438.06,3326.84) 2426.18,3314.96 2427.96,3313.18 cw(c2406.12,3291.34) 2437.01,3291.34 ccw(c2444.88,3291.34) 2444.88,3283.46 2527.56,3283.46 ccw(c2527.56,3295.28) 2539.37,3295.28 2539.37,3323.51 cw(c2566.25,3323.51) 2547.24,3342.52 2553.49,3348.76 cw(c2566.93,3335.32) 2566.93,3354.33 2566.93,3366.14 2551.18,3366.14 cw(c2541.68,3366.14) 2548.4,3359.42 2535.43,3346.46 cw(c2516.42,3365.47) 2516.42,3338.58 2451.94,3338.58 cw(c2456.02,3350.74) 2446.96,3341.67 ccw(c2437.78,3332.5) 2437.78,3345.47 2436.02,3345.47 ccw(c2436.02,3330.71) 2421.26,3330.71
  region net 3V3_BNO: 2468.5,3125.98 cw(c2460.95,3118.43) 2471.63,3118.43 2471.63,3087.42 ccw(c2484.25,3087.42) 2484.25,3074.8 2492.13,3074.8 ccw(c2492.13,3082.68) 2500,3082.68 2500,3102.36 cw(c2507.87,3102.36) 2507.87,3110.24 2507.87,3125.98
  region net 3V3_main: 3275.59,3429.13 cw(c3275.59,3423.23) 3281.5,3423.23 3281.5,3409.45 ccw(c3303.15,3409.45) 3303.15,3387.8 3311.02,3387.8 cw(c3311.02,3379.92) 3318.9,3379.92 3318.9,3360.24 cw(c3311.02,3360.24) 3311.02,3352.36 3215.55,3352.36 cw(c3215.55,3383.86) 3184.06,3383.86 3184.06,3397.64 cw(c3215.55,3397.64) 3215.55,3429.13
  region net 5V_main: 3275.59,3114.17 cw(c3275.59,3108.27) 3281.5,3108.27 3281.5,3094.49 ccw(c3303.15,3094.49) 3303.15,3072.83 3311.02,3072.83 cw(c3311.02,3064.96) 3318.9,3064.96 3318.9,3045.28 cw(c3311.02,3045.28) 3311.02,3037.4 3215.55,3037.4 cw(c3215.55,3068.9) 3184.06,3068.9 3184.06,3082.68 cw(c3215.55,3082.68) 3215.55,3114.17
  region net 5V_in: 3367.77,2738.53 ccw(c3381.21,2751.97) 3367.77,2738.53 3389.96,2716.34 cw(c3342.92,2669.29) 3409.45,2669.29 3449.97,2628.77 cw(c3443.25,2622.05) 3452.76,2622.05 3476.38,2645.67 cw(c3504.89,2674.18) 3464.57,2674.18 3464.57,2763.78 ccw(c3445.56,2763.78) 3459,2777.22 3425.2,2811.02 ccw(c3415.69,2801.52) 3415.69,2814.96 3409.45,2814.96 ccw(c3409.45,2776.94) 3382.57,2803.82 ccw(c3431.72,2754.67) 3382.57,2803.82 3359.9,2781.16 ccw(c3373.34,2767.72) 3354.33,2767.72 ccw(c3392.35,2767.72) 3365.47,2740.83 3367.77,2738.53
  region net VBAT/5V: 3525.59,3083.66 cw(c3494.7,3114.55) 3494.7,3070.87 3457.68,3070.87 ccw(c3457.68,3058.07) 3444.88,3058.07 3444.88,3041.34 ccw(c3457.68,3041.34) 3457.68,3028.54 3473.43,3028.54 cw(c3473.43,3002.95) 3499.02,3002.95 ccw(c3500,3002.95) 3500,3001.97 3532.48,3001.97 3532.48,3018.25 cw(c3592.97,3018.25) 3550.2,3061.02
  region net NetC16_1: 3498.47,3397.64 ccw(c3498.47,3434.6) 3524.61,3408.46 ccw(c3519.85,3413.22) 3526.57,3413.22 3526.57,3420.28 ccw(c3512.8,3420.28) 3512.8,3434.06 3498.85,3434.06 ccw(c3498.85,3427.33) 3494.09,3432.09 cw(c3486.97,3439.22) 3486.97,3429.13 3452.76,3429.13 3452.76,3399.61 ccw(c3457.51,3404.36) 3457.51,3397.64
  region net NetC23_1: 3498.47,3082.68 ccw(c3498.47,3119.64) 3524.61,3093.5 ccw(c3519.85,3098.26) 3526.57,3098.26 3526.57,3105.32 ccw(c3512.8,3105.32) 3512.8,3119.09 3498.85,3119.09 ccw(c3498.85,3112.37) 3494.09,3117.13 cw(c3486.97,3124.25) 3486.97,3114.17 3452.76,3114.17 3452.76,3084.65 ccw(c3457.51,3089.4) 3457.51,3082.68
  region net 3V3_main: 2255.91,2740.16 ccw(c2255.91,2759.17) 2269.35,2745.73 2275.59,2751.97 cw(c2294.6,2732.96) 2294.6,2759.84 2295.28,2759.84 ccw(c2295.28,2775.59) 2311.02,2775.59 2311.02,2779.53 ccw(c2299.21,2779.53) 2299.21,2791.34 2270.98,2791.34 ccw(c2270.98,2764.46) 2251.97,2783.46 2247.36,2778.85 ccw(c2274.24,2751.97) 2236.22,2751.97 ccw(c2245.73,2751.97) 2239,2745.25 2240.16,2744.09 ccw(c2249.66,2753.6) 2249.66,2740.16
  region net NetD21_2: 2094.49,2452.76 2094.49,2437.01 cw(c2066.93,2437.01) 2066.93,2409.45 ccw(c2066.93,2389.76) 2047.24,2389.76 2047.24,2385.83 ccw(c2062.99,2385.83) 2062.99,2370.08 2102.36,2370.08 ccw(c2102.36,2405.51) 2137.8,2405.51 2137.8,2444.88 ccw(c2122.05,2444.88) 2122.05,2460.63 2102.36,2460.63 ccw(c2102.36,2452.76)
  region net 3V3_ERM: 2169.29,2374.02 cw(c2169.29,2381.89) 2161.42,2381.89 2161.42,2413.39 cw(c2192.91,2413.39) 2192.91,2444.88 2236.22,2444.88 cw(c2236.22,2433.07) 2248.03,2433.07 2248.03,2429.13 cw(c2236.22,2429.13) 2236.22,2417.32 ccw(c2236.22,2409.45) 2228.35,2409.45 2228.35,2385.83 cw(c2216.54,2385.83) 2216.54,2374.02
  region net 3V3_BZ: 2318.9,2711.92 cw(c2292.01,2711.92) 2311.02,2692.91 2310.35,2692.24 ccw(c2337.23,2665.35) 2299.21,2665.35 2299.21,2661.42 ccw(c2311.02,2661.42) 2311.02,2649.61 2330.71,2649.61 ccw(c2330.71,2665.35) 2346.46,2665.35 2346.46,2779.53 ccw(c2338.58,2779.53) 2338.58,2787.4 2326.77,2787.4 ccw(c2326.77,2779.53) 2318.9,2779.53
  region net VBAT: 2413.39,2434.7 cw(c2399.94,2434.7) 2409.45,2425.2 ccw(c2447.47,2387.18) 2393.7,2387.18 2393.7,2385.83 ccw(c2429.13,2385.83) 2429.13,2350.39 2487.23,2350.39 ccw(c2487.23,2390.72) 2515.75,2362.2 2515.75,2409.45 cw(c2515.75,2433.07) 2492.13,2433.07 2492.13,2456.69 ccw(c2476.38,2456.69) 2476.38,2472.44 2460.63,2472.44 cw(c2460.63,2484.25) 2448.82,2484.25 2448.82,2511.81 ccw(c2437.01,2511.81) 2437.01,2523.62 2421.26,2523.62 ccw(c2421.26,2515.75) 2413.39,2515.75
  region net RS485_A: 2912.4,3878.94 cw(c2898.62,3878.94) 2898.62,3865.16 2897.64,3865.16 cw(c2897.64,3877.95) 2884.84,3877.95 2884.84,3925.2 cw(c2893.7,3925.2) 2893.7,3934.06 2905.51,3934.06 cw(c2905.51,3927.17) 2912.4,3927.17
  region net RS485_B: 2860.24,3877.95 2860.24,3909.45 ccw(c2837.6,3909.45) 2837.6,3932.09 2823.82,3932.09 ccw(c2823.82,3922.24) 2813.98,3922.24 2813.98,3900.59 ccw(c2848.43,3900.59) 2848.43,3866.14 ccw(c2848.43,3877.95)
  region net RS485_A: 2180.12,3416.34 cw(c2180.12,3402.56) 2193.9,3402.56 2193.9,3401.57 cw(c2181.1,3401.57) 2181.1,3388.78 2133.86,3388.78 cw(c2133.86,3397.64) 2125,3397.64 2125,3409.45 cw(c2131.89,3409.45) 2131.89,3416.34
  region net RS485_B: 2181.1,3364.17 2149.61,3364.17 ccw(c2149.61,3341.54) 2126.97,3341.54 2126.97,3327.76 ccw(c2136.81,3327.76) 2136.81,3317.91 2158.46,3317.91 ccw(c2158.46,3352.36) 2192.91,3352.36 ccw(c2181.1,3352.36)
  region net RS485_A: 2180.12,3038.39 cw(c2180.12,3024.61) 2193.9,3024.61 2193.9,3023.62 cw(c2181.1,3023.62) 2181.1,3010.83 2133.86,3010.83 cw(c2133.86,3019.68) 2125,3019.68 2125,3031.5 cw(c2131.89,3031.5) 2131.89,3038.39
  region net RS485_B: 2181.1,2986.22 2149.61,2986.22 ccw(c2149.61,2963.58) 2126.97,2963.58 2126.97,2949.8 ccw(c2136.81,2949.8) 2136.81,2939.96 2158.46,2939.96 ccw(c2158.46,2974.41) 2192.91,2974.41 ccw(c2181.1,2974.41)
  region net RS485_A: 3567.91,3339.57 cw(c3567.91,3353.35) 3554.13,3353.35 3554.13,3354.33 cw(c3566.93,3354.33) 3566.93,3367.13 3614.17,3367.13 cw(c3614.17,3358.27) 3623.03,3358.27 3623.03,3346.46 cw(c3616.14,3346.46) 3616.14,3339.57
  region net RS485_B: 3566.93,3391.73 3598.43,3391.73 ccw(c3598.43,3414.37) 3621.06,3414.37 3621.06,3428.15 ccw(c3611.22,3428.15) 3611.22,3437.99 3589.57,3437.99 ccw(c3589.57,3403.54) 3555.12,3403.54 ccw(c3566.93,3403.54)
  region net RS485_B: 3566.93,3013.78 3598.43,3013.78 ccw(c3598.43,3036.42) 3621.06,3036.42 3621.06,3050.2 ccw(c3611.22,3050.2) 3611.22,3060.04 3589.57,3060.04 ccw(c3589.57,3025.59) 3555.12,3025.59 ccw(c3566.93,3025.59)
  region net RS485_A: 3567.91,2961.61 cw(c3567.91,2975.39) 3554.13,2975.39 3554.13,2976.38 cw(c3566.93,2976.38) 3566.93,2989.17 3614.17,2989.17 cw(c3614.17,2980.32) 3623.03,2980.32 3623.03,2968.5 cw(c3616.14,2968.5) 3616.14,2961.61
GND1 (plane layer: these items are gaps in the copper):
  region: 3503.94,4074.8 3503.94,3818.9 3759.84,3818.9 3759.84,4074.8
  region: 1988.19,4074.8 1988.19,3818.9 2244.09,3818.9 2244.09,4074.8
GND2 (plane layer: these items are gaps in the copper):
  region: 3503.94,4074.8 3503.94,3818.9 3759.84,3818.9 3759.84,4074.8
  region: 1988.19,4074.8 1988.19,3818.9 2244.09,3818.9 2244.09,4074.8

## Silkscreen, mask and mechanical layers (free items; w line width, h text height)
Top Overlay:
  drawing of 24 lines, arcs and shapes, not listed
  text "RGB LED" at 2799.21,3456.69 h47.24
  text "Model: ES-Master / Version: V1.0 / Date: 25/03/2026" at 2251.97,2416.93 h47.24
Bottom Overlay:
  drawing of 21 lines, arcs and shapes, not listed
  text "GND" at 3732.21,3779.53 h39.37
  text "DIO" at 2255.91,3740.16 h39.37
  text "SWO" at 2330.93,3700.79 h39.37
  text "RST" at 3602.36,3696.85 h39.37
  text "CLK" at 2255.91,3661.42 h39.37
  text "CLK" at 3665.35,3657.48 h39.37
  text "RST" at 2318.9,3622.05 h39.37
  text "SWO" at 3602.36,3618.11 h39.37
  text "GND" at 2267.64,3582.68 h39.37
  text "DIO" at 3665.35,3578.74 h39.37
  text "Micro SD" at 3177.17,2570.87 h47.24 r270

## Text inside footprints (layer, text, board x,y; h text height)
J1: Top Assembly "PCB Edge" at 3570.91,2408.35 h27.56 r45
LS1: Top Overlay "-" at 2338.7,2646.18 h39.37 r270; Top Overlay "+" at 2338.7,2736.18 h39.37 r270